# Altium PCB PCB_MATIASALFARO_PROYECTOFINAL.PcbDoc
Units mil, origin at the board's own origin, x right, y up, seen from the top; angles counter-clockwise.
Board outline 3543.31 x 2244.09 mil, 2 copper layers (Top Layer, Bottom Layer); 59 components, 43 nets, 235 pads, 66 vias.
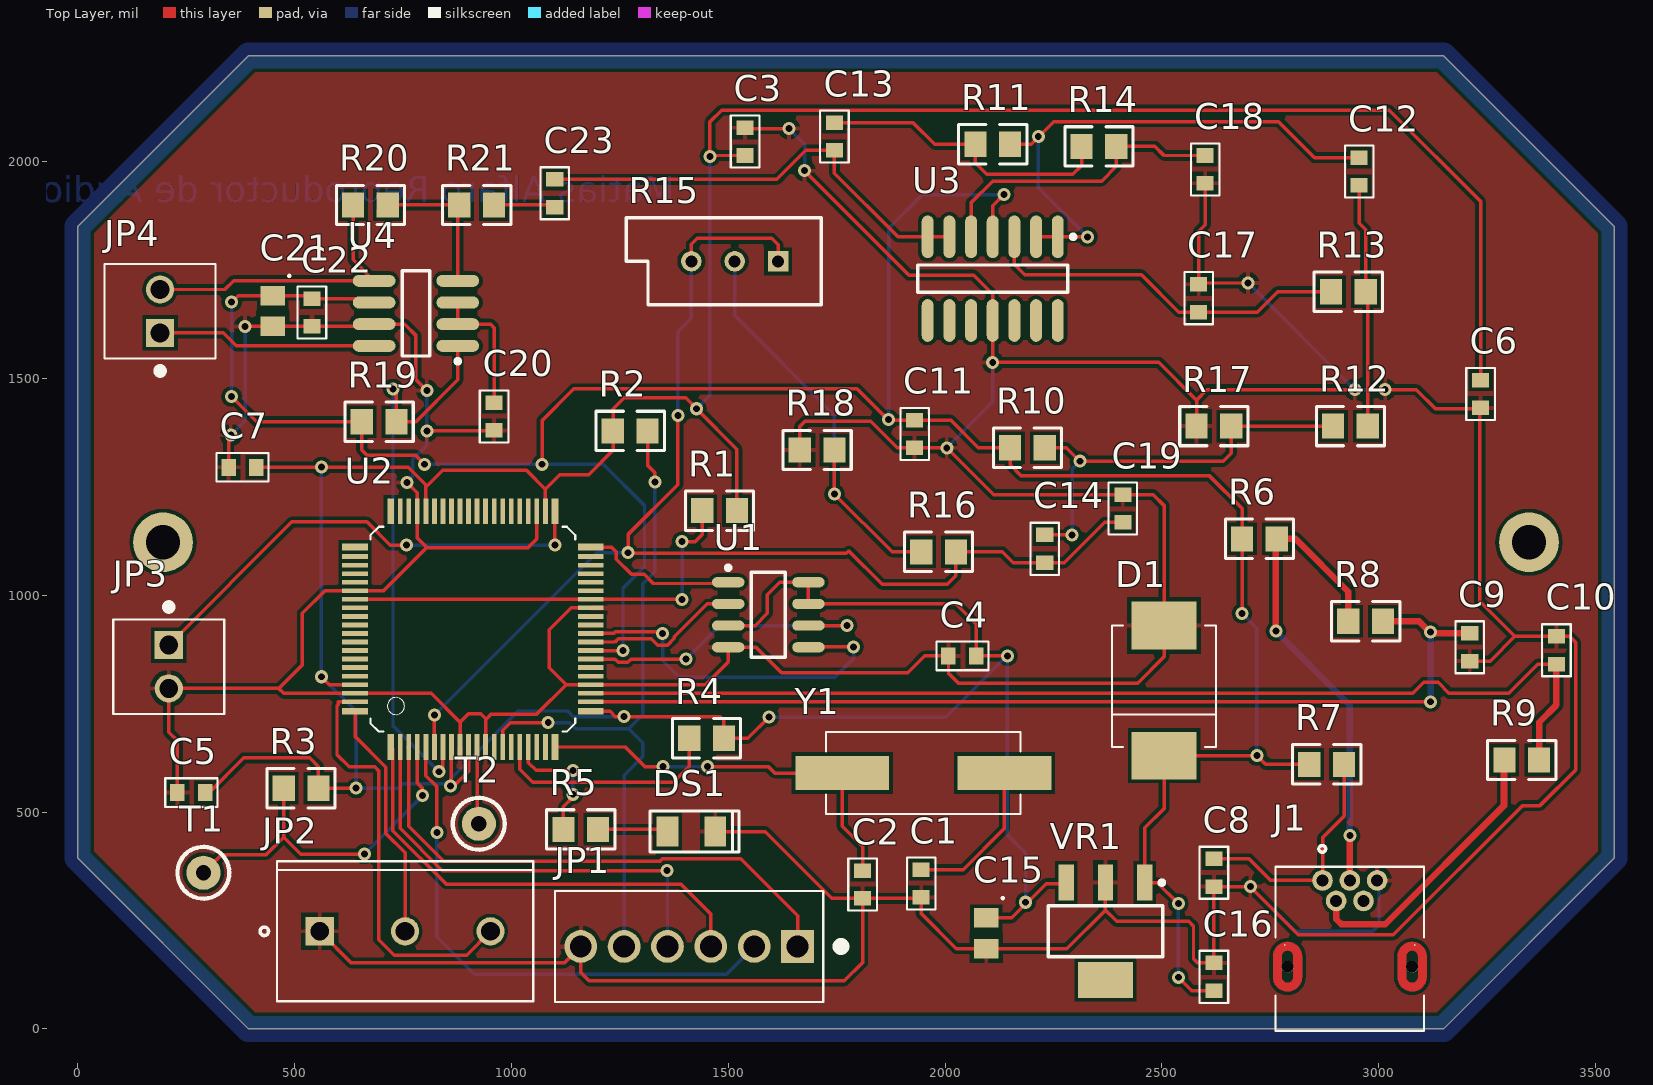
[diagram p0: Top Layer view]
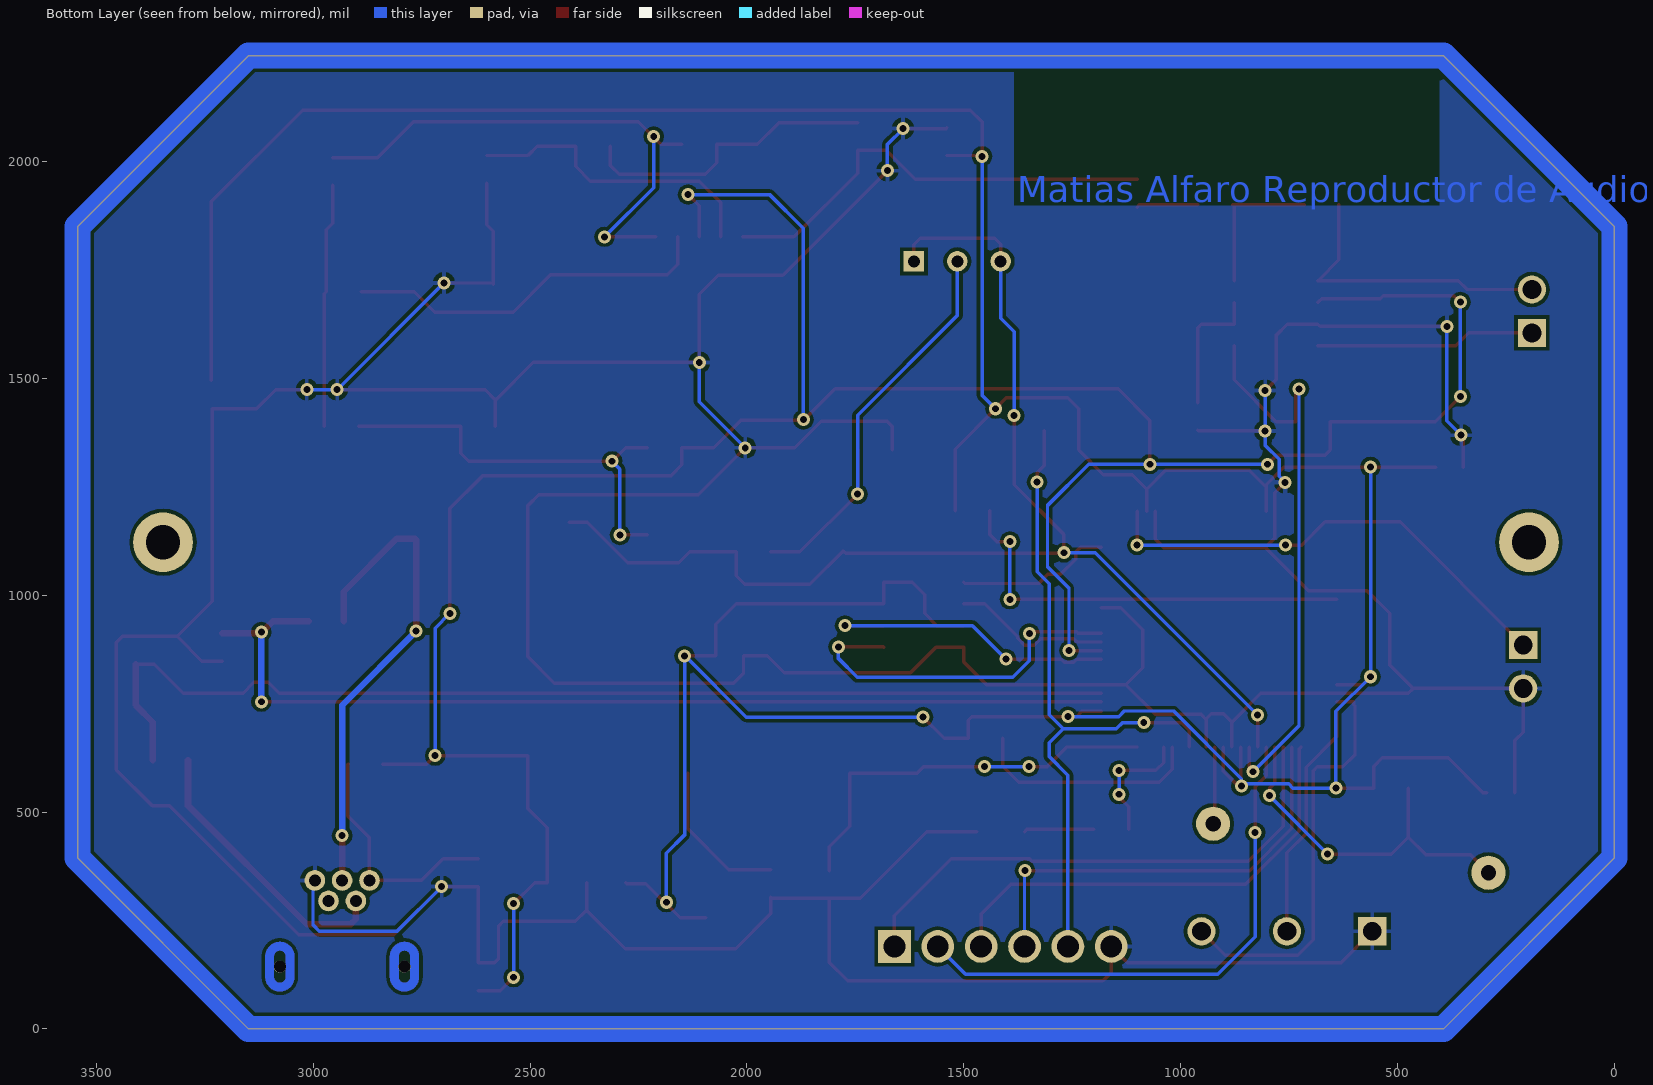
[diagram p1: Bottom Layer view, seen from below]
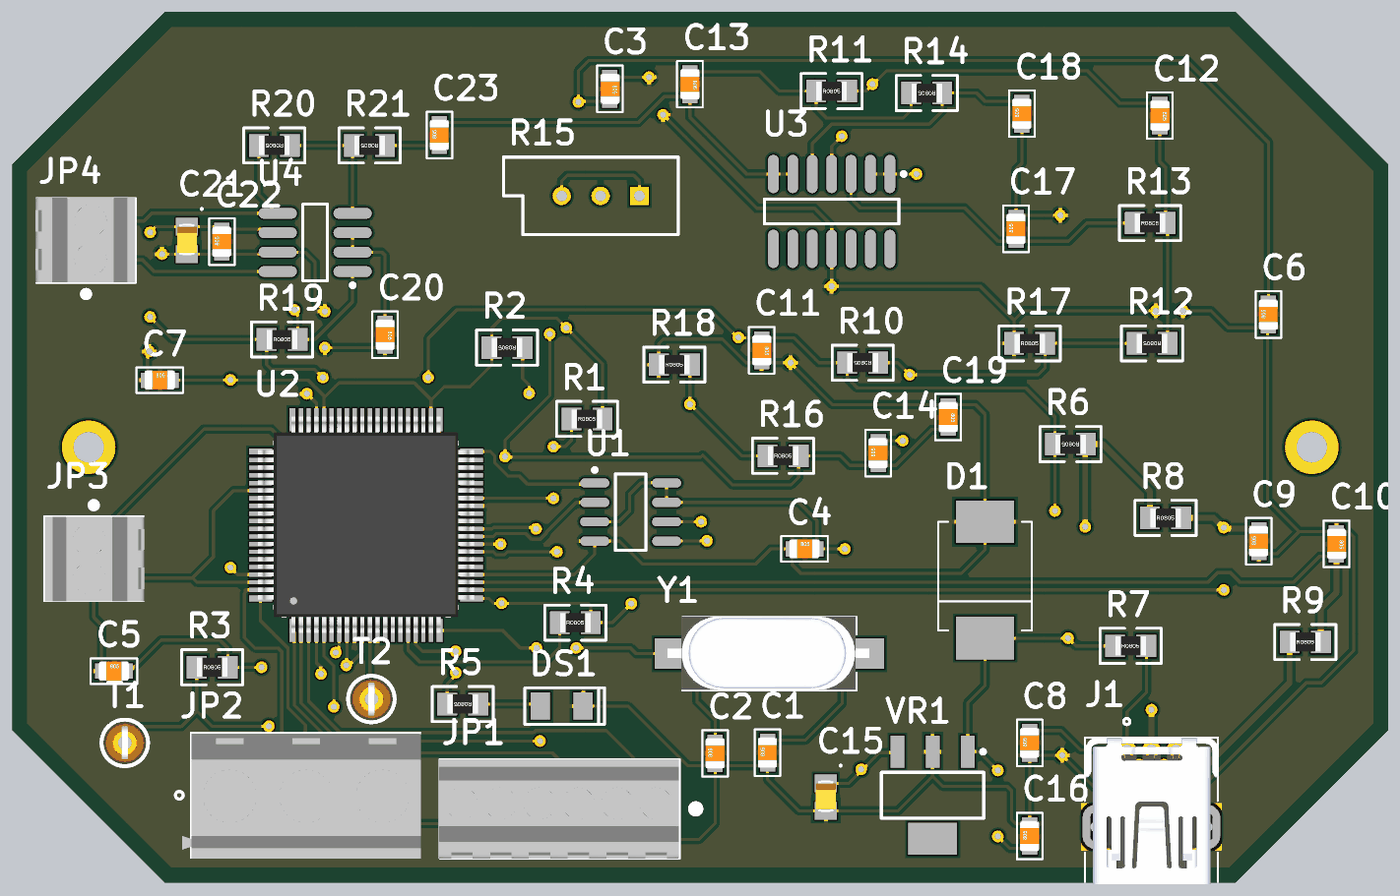
[diagram p2: 3D render of the assembled board from above, using the file's embedded part models]

## Layer stack, top to bottom
Top Solder: solder mask 0.4, Solder Resist, Dk 3.5
Top Layer: signal copper 1.4
Dielectric 1: dielectric 12.6, FR-4, Dk 4.8
Bottom Layer: signal copper 1.4
Bottom Solder: solder mask 0.4, Solder Resist, Dk 3.5

## Board outline
0,393.7 393.7,0 3149.61,0 3543.31,393.7 3543.31,1850.39 3149.61,2244.09 393.7,2244.09 0,1850.39

## Design rules (kind name [scope] priority, off if disabled: settings)
Clearance [All] p1: gap=8 ignorepadtopadclearanceinfootprint=FALSE
DiffPairsRouting [All] p1: maxlimit=10 minlimit=10 mostfreqgap=10 toplayer_minwidth=15 toplayer_maxwidth=15 toplayer_prefwidth=15 bottomlayer_minwidth=15 bottomlayer_maxwidth=15 bottomlayer_prefwidth=15 maxuncoupledlength=500
MinimumSolderMaskSliver [All] p1: minsoldermaskwidth=0
PolygonConnect [All] p1: connectstyle=Relief reliefconductorwidth=10 reliefentries=4 polygonreliefangle="90 Angle" airgapwidth=10
RoutingVias [All] p1: holewidth=16 width=30 viastyle="Through Hole" minholewidth=16 minwidth=30 maxholewidth=28 maxwidth=50
SilkToSilkClearance [All] p1: silktosilkclearance=0
SilkToSolderMaskClearance [IsPad] p1: minsilkscreentomaskgap=0 clearancetoexposedcopper=TRUE
SolderMaskExpansion [All] p1: expansion=4
Width [All] p1: maxlimit=100 minlimit=8 preferedwidth=8
26 further rules are at their usual default settings.

## Classes and differential pairs
differential pair USB_D: +USB_D_P -USB_D_N
differential pair Micro_USB_D: +Micro_USB_D_P -Micro_USB_D_N

## Components (designator, comment, footprint, x,y, rotation, side; value= is the part's Value field where it differs from the comment)
C1 "Cap 33pF" "C 0805" 1945,335 r90 top value=33pF
C2 "Cap 33pF" "C 0805" 1810,333 r90 top value=33pF
C3 "Cap 100nF" "C 0805" 1539,2046 r270 top value=100nF
C4 "Cap 100nF" "C 0805" 2040,860 r0 top value=100nF
C5 "Cap 100nF" "C 0805" 262,545 r0 top value=100nF
C6 "Cap 100nF" "C 0805" 3235,1464 r90 top value=100nF
C7 "Cap 100nF" "C 0805" 380,1295 r0 top value=100nF
C8 "Cap 100nF" "C 0805" 2620,360 r90 top value=100nF
C9 "Cap 18pF" "C 0805" 3210,880 r90 top value=18pF
C10 "Cap 18pF" "C 0805" 3410,873 r270 top value=18pF
C11 "Cap 100nF" "C 0805" 1930,1372 r270 top value=100nF
C12 "Cap 4.7nF" "C 0805" 2955,1977 r270 top value=4.7nF
C13 "Cap 68nF" "C 0805" 1745,2058 r270 top value=68nF
C14 "Cap 100nF" "C 0805" 2230,1107 r90 top value=100nF
C15 "Cap 10uF x 16V" "c 0805 Tantalio" 2095,220.43 r270 top value="10uF x 16V"
C16 "Cap 220nF" "C 0805" 2620,120 r90 top value=220nF
C17 "Cap 2.7nF" "C 0805" 2585,1685 r90 top value=2.7nF
C18 "Cap 2.7nF" "C 0805" 2600,1982 r90 top value=2.7nF
C19 "Cap 68nF" "C 0805" 2410,1200 r270 top value=68nF
C20 "Cap 1uF" "C 0805" 960,1412 r270 top value=1uF
C21 "Cap 100uF x 16v" "c 0805 Tantalio" 450,1655.43 r270 top value="100uF x 16v"
C22 "Cap 100nF" "C 0805" 540,1652 r90 top value=100nF
C23 "Cap 470nF" "C 0805" 1100,1927 r90 top value=470nF
D1 "5.1V" DIODE_SMC 2505,780 r90 top
DS1 "LED SMD" "LED 1206 RED" 1415,455 r0 top
J1 "Conector Mini  USB" "Mini USB Hembra 90º DIP" 2933.5,143.43 r270 top
JP1 "Conector 6 pines" "Bornera 6 (2.54mm)" 1410,190 r180 top
JP2 "PUERTO SERIAL" "Bornera 3 (5mm)" 755,225 r0 top
JP3 "Pines M. a 90º + Jumper" "Bornera 2 (2.54mm)" 210,835 r270 top
JP4 "Pines M. a 90º + Jumper" "Bornera 2 (2.54mm)" 190,1655 r90 top
R1 "Res 0" "R 0805" 1480,1195 r0 top value=0
R2 "Res 10K" "R 0805" 1274,1379 r180 top value=10K
R3 "Res 10K" "R 0805" 515,555 r0 top value=10K
R4 "Res 0" "R 0805" 1450,670 r0 top value=0
R5 "Res 470" "R 0805" 1160,460 r180 top value=470
R6 "Res 1K5" "R 0805" 2725,1130 r180 top value=1K5
R7 "Res 100" "R 0805" 2880,610 r0 top value=100
R8 "Res 33" "R 0805" 2970,940 r0 top value=33
R9 "Res 33" "R 0805" 3330,620 r0 top value=33
R10 "Res 154K" "R 0805" 2190,1340 r180 top value=154K
R11 "Res 2K7" "R 0805" 2110,2040 r0 top value=2K7
R12 "Res 7K68" "R 0805" 2935,1390 r180 top value=7K68
R13 "Res 16K2" "R 0805" 2930,1700 r0 top value=16K2
R14 "Res 6K34" "R 0805" 2355,2035 r180 top value=6K34
R15 "RPot 500" VR5 1515,1770 r180 top value=500
R16 "Res 2K" "R 0805" 1985,1100 r0 top value=2K
R17 "Res 154K" "R 0805" 2620,1390 r0 top value=154K
R18 "Res 100" "R 0805" 1705,1335 r0 top value=100
R19 "Res 330K" "R 0805" 695,1400 r0 top value=330K
R20 "Res 22K" "R 0805" 675,1900 r180 top value=22K
R21 "Res 22K" "R 0805" 920,1900 r180 top value=22K
T1 "Test Point" "TestPoint Keystone 5000 Silver-Red" 290,360 r0 top
T2 "Test Point" "TestPoint Keystone 5000 Silver-Red" 925,473 r0 top
U1 "SST25VF032B" SO8_L 1592.52,955 r0 top
U2 "LPC1754" LQFP80 911.1,921.65 r0 top
U3 "MC33204" D014_M 2110,1730 r270 top
U4 "TS4871" SO8_M 780,1650 r180 top
VR1 "LM1117 3,3V" SOT223_L 2370,225 r270 top
Y1 "12 MHz" Cristal 1950,590 r0 top

## Footprints (in the part's own frame and the unit in brackets; to place one, negate y for a bottom-side part, rotate by r counter-clockwise, add the part's x,y. Pads: shape width x height; smd on the part's side, far side on the other; paste and mask are expansions set on the pad)
"Bornera 2 (2.54mm)" [mm] "CONN_282834-2"
  rect 1.65x1.65 hole 1.1: 1(-1.27,0)
  round 1.65 hole 1.1: 2(1.27,0)
  silkscreen extent -3.7,-3.25 2.77,3.25, body extent -2.74,-3.2 2.8,3.3, height 10.05
"Bornera 3 (5mm)" [mm] "TE_282836-3"
  rect 1.65x1.65 hole 1.1: 1(-5,0)
  round 1.65 hole 1.1: 2(0,0) 3(5,0)
  silkscreen extent -8.5,-4.1 7.5,4.1, body extent -8.05,-4.16 7.55,4.04, height 10.08
"Bornera 6 (2.54mm)" [mm]
  rect 1.92x1.92 hole 1.28: 1(-6.35,0)
  round 1.92 hole 1.28: 2(-3.81,0) 3(-1.27,0) 4(1.27,0) 5(3.81,0) 6(6.35,0)
  silkscreen extent -9.14,-3.25 7.85,3.25, body extent -7.8,-3.25 7.9,3.25, height 10.05
"C 0805" [mm]
  rect 0.85x1 smd: 1(-0.813,0) 2(0.813,0)
  silkscreen extent -1.52,-0.84 1.52,0.84, body extent -1,-0.62 1,0.64, height 0.78
"c 0805 Tantalio" [mm] "CAPC2012X140N"
  rect 1.15x1.45 smd: 1(-0.9,0) 2(0.9,0)
  silkscreen extent -2.08,0.94 -2.03,0.99, body extent -1.08,-0.65 0.97,0.65, height 1.2
Cristal [mm] "XTAL_ECS-120-18-5PX-TR"
  rect 5.5x2 smd: 1(-4.75,0) 2(4.75,0)
  silkscreen extent -5.7,-2.4 5.7,2.4, body extent -6.68,-2.36 6.52,2.44, height 4.3
D014_M [mm] "SOIC, 14-Leads, Body 8.7x3.9mm, Pitch 1.27mm, IPC Low Density"
  oval 2.5x0.7 smd: 1(-2.45,3.81) 2(-2.45,2.54) 3(-2.45,1.27) 4(-2.45,0) 5(-2.45,-1.27) 6(-2.45,-2.54) 7(-2.45,-3.81) 8(2.45,-3.81) 9(2.45,-2.54) 10(2.45,-1.27) 11(2.45,0) 12(2.45,1.27) 13(2.45,2.54) 14(2.45,3.81)
  silkscreen extent -2.57,-4.4 0.8,4.84, body extent -2,-4.38 2,4.38, height 1.75
DIODE_SMC [mil] "Diode; 2 Leads"
  rect 110x150 smd: 1(-150,0) 2(150,0)
  silkscreen extent -130,-120 150,120
"LED 1206 RED" [mil]
  rect 50x70 smd: 1(-55.12,0) 2(55.12,0)
  silkscreen extent -95,-47 110,47, body extent -65,-31 69,32, height 20
LQFP80 [mm] "SOT315-1"
  rect 0.4x1.5 smd: 1(-4.81,-6.9) 20(4.81,-6.9) 41(4.81,6.9) 60(-4.81,6.9)
  rect 0.28x1.5 smd: 2(-4.25,-6.9) 3(-3.75,-6.9) 4(-3.25,-6.9) 5(-2.75,-6.9) 6(-2.25,-6.9) 7(-1.75,-6.9) 8(-1.25,-6.9) 9(-0.75,-6.9) 10(-0.25,-6.9) 11(0.25,-6.9) 12(0.75,-6.9) 13(1.25,-6.9) 14(1.75,-6.9) 15(2.25,-6.9) 16(2.75,-6.9) 17(3.25,-6.9) 18(3.75,-6.9) 19(4.25,-6.9) 42(4.25,6.9) 43(3.75,6.9) 44(3.25,6.9) 45(2.75,6.9) 46(2.25,6.9) 47(1.75,6.9) 48(1.25,6.9) 49(0.75,6.9) 50(0.25,6.9) 51(-0.25,6.9) 52(-0.75,6.9) 53(-1.25,6.9) 54(-1.75,6.9) 55(-2.25,6.9) 56(-2.75,6.9) 57(-3.25,6.9) 58(-3.75,6.9) 59(-4.25,6.9)
  rect 1.5x0.4 smd: 21(6.9,-4.81) 40(6.9,4.81) 61(-6.9,4.81) 80(-6.9,-4.81)
  rect 1.5x0.28 smd: 22(6.9,-4.25) 23(6.9,-3.75) 24(6.9,-3.25) 25(6.9,-2.75) 26(6.9,-2.25) 27(6.9,-1.75) 28(6.9,-1.25) 29(6.9,-0.75) 30(6.9,-0.25) 31(6.9,0.25) 32(6.9,0.75) 33(6.9,1.25) 34(6.9,1.75) 35(6.9,2.25) 36(6.9,2.75) 37(6.9,3.25) 38(6.9,3.75) 39(6.9,4.25) 62(-6.9,4.25) 63(-6.9,3.75) 64(-6.9,3.25) 65(-6.9,2.75) 66(-6.9,2.25) 67(-6.9,1.75) 68(-6.9,1.25) 69(-6.9,0.75) 70(-6.9,0.25) 71(-6.9,-0.25) 72(-6.9,-0.75) 73(-6.9,-1.25) 74(-6.9,-1.75) 75(-6.9,-2.25) 76(-6.9,-2.75) 77(-6.9,-3.25) 78(-6.9,-3.75) 79(-6.9,-4.25)
  silkscreen extent -6,-6 6,6, body extent -7.07,-7.06 7.07,7.09, height 1.6
"Mini USB Hembra 90º DIP" [mm] "TE_2172034-1"
  round 1.208 hole 0.7: 1(-5.05,-1.6) 2(-3.85,-0.8) 3(-5.05,0) 4(-3.85,0.8) 5(-5.05,1.6)
  rect 0.1x0.1 smd paste-1 mask+0: SH1(-1.27,3.81) SH2(-1.27,-3.81)
  round 0.7 hole 0.7 unplated: SH1(0,3.65) SH2(0,-3.65)
  Top Layer region: 0.644,-2.801 0.689,-2.805 0.733,-2.81 0.777,-2.819 0.82,-2.829 0.863,-2.842 0.905,-2.856 0.946,-2.873 0.986,-2.893 1.025,-2.914 1.063,-2.937 1.1,-2.962 1.135,-2.989 1.169,-3.018 1.201,-3.049 1.232,-3.081 1.261,-3.115 1.288,-3.15 1.313,-3.187 1.336,-3.225 1.357,-3.264 1.377,-3.304 1.394,-3.345 1.408,-3.387 1.421,-3.43 1.431,-3.473 1.44,-3.517 1.445,-3.561 1.449,-3.606 1.45,-3.65 0.95,-3.65 0.95,-3.632 0.948,-3.613 0.946,-3.595 0.942,-3.577 0.938,-3.559 0.933,-3.542 0.927,-3.525 0.92,-3.508 0.912,-3.491 0.903,-3.475 0.894,-3.459 0.883,-3.444 0.872,-3.43 0.86,-3.416 0.847,-3.403 0.834,-3.39 0.82,-3.378 0.806,-3.367 0.791,-3.356 0.775,-3.347 0.759,-3.338 0.742,-3.33 0.725,-3.323 0.708,-3.317 0.691,-3.312 0.673,-3.308 0.655,-3.304 0.637,-3.302 0.618,-3.3 0.6,-3.3 0,-3.3 0,-2.8 0.6,-2.8
  Top Layer region: 1.449,-3.694 1.445,-3.739 1.44,-3.783 1.431,-3.827 1.421,-3.87 1.408,-3.913 1.394,-3.955 1.377,-3.996 1.357,-4.036 1.336,-4.075 1.313,-4.113 1.288,-4.15 1.261,-4.185 1.232,-4.219 1.201,-4.251 1.169,-4.282 1.135,-4.311 1.1,-4.338 1.063,-4.363 1.025,-4.386 0.986,-4.407 0.946,-4.427 0.905,-4.444 0.863,-4.458 0.82,-4.471 0.777,-4.481 0.733,-4.49 0.689,-4.495 0.644,-4.499 0.6,-4.5 0,-4.5 0,-4 0.6,-4 0.618,-4 0.637,-3.998 0.655,-3.996 0.673,-3.992 0.691,-3.988 0.708,-3.983 0.725,-3.977 0.742,-3.97 0.759,-3.962 0.775,-3.953 0.791,-3.944 0.806,-3.933 0.82,-3.922 0.834,-3.91 0.847,-3.897 0.86,-3.884 0.872,-3.87 0.883,-3.856 0.894,-3.841 0.903,-3.825 0.912,-3.809 0.92,-3.792 0.927,-3.775 0.933,-3.758 0.938,-3.741 0.942,-3.723 0.946,-3.705 0.948,-3.687 0.95,-3.668 0.95,-3.65 1.45,-3.65
  Top Layer region: -0.95,-3.668 -0.948,-3.687 -0.946,-3.705 -0.942,-3.723 -0.938,-3.741 -0.933,-3.758 -0.927,-3.775 -0.92,-3.792 -0.912,-3.809 -0.903,-3.825 -0.894,-3.841 -0.883,-3.856 -0.872,-3.87 -0.86,-3.884 -0.847,-3.897 -0.834,-3.91 -0.82,-3.922 -0.806,-3.933 -0.791,-3.944 -0.775,-3.953 -0.759,-3.962 -0.742,-3.97 -0.725,-3.977 -0.708,-3.983 -0.691,-3.988 -0.673,-3.992 -0.655,-3.996 -0.637,-3.998 -0.618,-4 -0.6,-4 0,-4 0,-4.5 -0.6,-4.5 -0.644,-4.499 -0.689,-4.495 -0.733,-4.49 -0.777,-4.481 -0.82,-4.471 -0.863,-4.458 -0.905,-4.444 -0.946,-4.427 -0.986,-4.407 -1.025,-4.386 -1.063,-4.363 -1.1,-4.338 -1.135,-4.311 -1.169,-4.282 -1.201,-4.251 -1.232,-4.219 -1.261,-4.185 -1.288,-4.15 -1.313,-4.113 -1.336,-4.075 -1.357,-4.036 -1.377,-3.996 -1.394,-3.955 -1.408,-3.913 -1.421,-3.87 -1.431,-3.827 -1.44,-3.783 -1.445,-3.739 -1.449,-3.694 -1.45,-3.65 -0.95,-3.65
  Top Layer region: 0,-3.3 -0.6,-3.3 -0.618,-3.3 -0.637,-3.302 -0.655,-3.304 -0.673,-3.308 -0.691,-3.312 -0.708,-3.317 -0.725,-3.323 -0.742,-3.33 -0.759,-3.338 -0.775,-3.347 -0.791,-3.356 -0.806,-3.367 -0.82,-3.378 -0.834,-3.39 -0.847,-3.403 -0.86,-3.416 -0.872,-3.43 -0.883,-3.444 -0.894,-3.459 -0.903,-3.475 -0.912,-3.491 -0.92,-3.508 -0.927,-3.525 -0.933,-3.542 -0.938,-3.559 -0.942,-3.577 -0.946,-3.595 -0.948,-3.613 -0.95,-3.632 -0.95,-3.65 -1.45,-3.65 -1.449,-3.606 -1.445,-3.561 -1.44,-3.517 -1.431,-3.473 -1.421,-3.43 -1.408,-3.387 -1.394,-3.345 -1.377,-3.304 -1.357,-3.264 -1.336,-3.225 -1.313,-3.187 -1.288,-3.15 -1.261,-3.115 -1.232,-3.081 -1.201,-3.049 -1.169,-3.018 -1.135,-2.989 -1.1,-2.962 -1.063,-2.937 -1.025,-2.914 -0.986,-2.893 -0.946,-2.873 -0.905,-2.856 -0.863,-2.842 -0.82,-2.829 -0.777,-2.819 -0.733,-2.81 -0.689,-2.805 -0.644,-2.801 -0.6,-2.8 0,-2.8
  Top Layer region: 0.644,4.499 0.689,4.495 0.733,4.49 0.777,4.481 0.82,4.471 0.863,4.458 0.905,4.444 0.946,4.427 0.986,4.407 1.025,4.386 1.063,4.363 1.1,4.338 1.135,4.311 1.169,4.282 1.201,4.251 1.232,4.219 1.261,4.185 1.288,4.15 1.313,4.113 1.336,4.075 1.357,4.036 1.377,3.996 1.394,3.955 1.408,3.913 1.421,3.87 1.431,3.827 1.44,3.783 1.445,3.739 1.449,3.694 1.45,3.65 0.95,3.65 0.95,3.668 0.948,3.687 0.946,3.705 0.942,3.723 0.938,3.741 0.933,3.758 0.927,3.775 0.92,3.792 0.912,3.809 0.903,3.825 0.894,3.841 0.883,3.856 0.872,3.87 0.86,3.884 0.847,3.897 0.834,3.91 0.82,3.922 0.806,3.933 0.791,3.944 0.775,3.953 0.759,3.962 0.742,3.97 0.725,3.977 0.708,3.983 0.691,3.988 0.673,3.992 0.655,3.996 0.637,3.998 0.618,4 0.6,4 0,4 0,4.5 0.6,4.5
  Top Layer region: 1.449,3.606 1.445,3.561 1.44,3.517 1.431,3.473 1.421,3.43 1.408,3.387 1.394,3.345 1.377,3.304 1.357,3.264 1.336,3.225 1.313,3.187 1.288,3.15 1.261,3.115 1.232,3.081 1.201,3.049 1.169,3.018 1.135,2.989 1.1,2.962 1.063,2.937 1.025,2.914 0.986,2.893 0.946,2.873 0.905,2.856 0.863,2.842 0.82,2.829 0.777,2.819 0.733,2.81 0.689,2.805 0.644,2.801 0.6,2.8 0,2.8 0,3.3 0.6,3.3 0.618,3.3 0.637,3.302 0.655,3.304 0.673,3.308 0.691,3.312 0.708,3.317 0.725,3.323 0.742,3.33 0.759,3.338 0.775,3.347 0.791,3.356 0.806,3.367 0.82,3.378 0.834,3.39 0.847,3.403 0.86,3.416 0.872,3.43 0.883,3.444 0.894,3.459 0.903,3.475 0.912,3.491 0.92,3.508 0.927,3.525 0.933,3.542 0.938,3.559 0.942,3.577 0.946,3.595 0.948,3.613 0.95,3.632 0.95,3.65 1.45,3.65
  Top Layer region: -0.95,3.632 -0.948,3.613 -0.946,3.595 -0.942,3.577 -0.938,3.559 -0.933,3.542 -0.927,3.525 -0.92,3.508 -0.912,3.491 -0.903,3.475 -0.894,3.459 -0.883,3.444 -0.872,3.43 -0.86,3.416 -0.847,3.403 -0.834,3.39 -0.82,3.378 -0.806,3.367 -0.791,3.356 -0.775,3.347 -0.759,3.338 -0.742,3.33 -0.725,3.323 -0.708,3.317 -0.691,3.312 -0.673,3.308 -0.655,3.304 -0.637,3.302 -0.618,3.3 -0.6,3.3 0,3.3 0,2.8 -0.6,2.8 -0.644,2.801 -0.689,2.805 -0.733,2.81 -0.777,2.819 -0.82,2.829 -0.863,2.842 -0.905,2.856 -0.946,2.873 -0.986,2.893 -1.025,2.914 -1.063,2.937 -1.1,2.962 -1.135,2.989 -1.169,3.018 -1.201,3.049 -1.232,3.081 -1.261,3.115 -1.288,3.15 -1.313,3.187 -1.336,3.225 -1.357,3.264 -1.377,3.304 -1.394,3.345 -1.408,3.387 -1.421,3.43 -1.431,3.473 -1.44,3.517 -1.445,3.561 -1.449,3.606 -1.45,3.65 -0.95,3.65
  Top Layer region: 0,4 -0.6,4 -0.618,4 -0.637,3.998 -0.655,3.996 -0.673,3.992 -0.691,3.988 -0.708,3.983 -0.725,3.977 -0.742,3.97 -0.759,3.962 -0.775,3.953 -0.791,3.944 -0.806,3.933 -0.82,3.922 -0.834,3.91 -0.847,3.897 -0.86,3.884 -0.872,3.87 -0.883,3.856 -0.894,3.841 -0.903,3.825 -0.912,3.809 -0.92,3.792 -0.927,3.775 -0.933,3.758 -0.938,3.741 -0.942,3.723 -0.946,3.705 -0.948,3.687 -0.95,3.668 -0.95,3.65 -1.45,3.65 -1.449,3.694 -1.445,3.739 -1.44,3.783 -1.431,3.827 -1.421,3.87 -1.408,3.913 -1.394,3.955 -1.377,3.996 -1.357,4.036 -1.336,4.075 -1.313,4.113 -1.288,4.15 -1.261,4.185 -1.232,4.219 -1.201,4.251 -1.169,4.282 -1.135,4.311 -1.1,4.338 -1.063,4.363 -1.025,4.386 -0.986,4.407 -0.946,4.427 -0.905,4.444 -0.863,4.458 -0.82,4.471 -0.777,4.481 -0.733,4.49 -0.689,4.495 -0.644,4.499 -0.6,4.5 0,4.5
  Bottom Layer region: 0,-3.3 -0.6,-3.3 -0.618,-3.3 -0.637,-3.302 -0.655,-3.304 -0.673,-3.308 -0.691,-3.312 -0.708,-3.317 -0.725,-3.323 -0.742,-3.33 -0.759,-3.338 -0.775,-3.347 -0.791,-3.356 -0.806,-3.367 -0.82,-3.378 -0.834,-3.39 -0.847,-3.403 -0.86,-3.416 -0.872,-3.43 -0.883,-3.444 -0.894,-3.459 -0.903,-3.475 -0.912,-3.491 -0.92,-3.508 -0.927,-3.525 -0.933,-3.542 -0.938,-3.559 -0.942,-3.577 -0.946,-3.595 -0.948,-3.613 -0.95,-3.632 -0.95,-3.65 -1.45,-3.65 -1.449,-3.606 -1.445,-3.561 -1.44,-3.517 -1.431,-3.473 -1.421,-3.43 -1.408,-3.387 -1.394,-3.345 -1.377,-3.304 -1.357,-3.264 -1.336,-3.225 -1.313,-3.187 -1.288,-3.15 -1.261,-3.115 -1.232,-3.081 -1.201,-3.049 -1.169,-3.018 -1.135,-2.989 -1.1,-2.962 -1.063,-2.937 -1.025,-2.914 -0.986,-2.893 -0.946,-2.873 -0.905,-2.856 -0.863,-2.842 -0.82,-2.829 -0.777,-2.819 -0.733,-2.81 -0.689,-2.805 -0.644,-2.801 -0.6,-2.8 0,-2.8
  Bottom Layer region: -0.95,-3.668 -0.948,-3.687 -0.946,-3.705 -0.942,-3.723 -0.938,-3.741 -0.933,-3.758 -0.927,-3.775 -0.92,-3.792 -0.912,-3.809 -0.903,-3.825 -0.894,-3.841 -0.883,-3.856 -0.872,-3.87 -0.86,-3.884 -0.847,-3.897 -0.834,-3.91 -0.82,-3.922 -0.806,-3.933 -0.791,-3.944 -0.775,-3.953 -0.759,-3.962 -0.742,-3.97 -0.725,-3.977 -0.708,-3.983 -0.691,-3.988 -0.673,-3.992 -0.655,-3.996 -0.637,-3.998 -0.618,-4 -0.6,-4 0,-4 0,-4.5 -0.6,-4.5 -0.644,-4.499 -0.689,-4.495 -0.733,-4.49 -0.777,-4.481 -0.82,-4.471 -0.863,-4.458 -0.905,-4.444 -0.946,-4.427 -0.986,-4.407 -1.025,-4.386 -1.063,-4.363 -1.1,-4.338 -1.135,-4.311 -1.169,-4.282 -1.201,-4.251 -1.232,-4.219 -1.261,-4.185 -1.288,-4.15 -1.313,-4.113 -1.336,-4.075 -1.357,-4.036 -1.377,-3.996 -1.394,-3.955 -1.408,-3.913 -1.421,-3.87 -1.431,-3.827 -1.44,-3.783 -1.445,-3.739 -1.449,-3.694 -1.45,-3.65 -0.95,-3.65
  Bottom Layer region: 1.449,-3.694 1.445,-3.739 1.44,-3.783 1.431,-3.827 1.421,-3.87 1.408,-3.913 1.394,-3.955 1.377,-3.996 1.357,-4.036 1.336,-4.075 1.313,-4.113 1.288,-4.15 1.261,-4.185 1.232,-4.219 1.201,-4.251 1.169,-4.282 1.135,-4.311 1.1,-4.338 1.063,-4.363 1.025,-4.386 0.986,-4.407 0.946,-4.427 0.905,-4.444 0.863,-4.458 0.82,-4.471 0.777,-4.481 0.733,-4.49 0.689,-4.495 0.644,-4.499 0.6,-4.5 0,-4.5 0,-4 0.6,-4 0.618,-4 0.637,-3.998 0.655,-3.996 0.673,-3.992 0.691,-3.988 0.708,-3.983 0.725,-3.977 0.742,-3.97 0.759,-3.962 0.775,-3.953 0.791,-3.944 0.806,-3.933 0.82,-3.922 0.834,-3.91 0.847,-3.897 0.86,-3.884 0.872,-3.87 0.883,-3.856 0.894,-3.841 0.903,-3.825 0.912,-3.809 0.92,-3.792 0.927,-3.775 0.933,-3.758 0.938,-3.741 0.942,-3.723 0.946,-3.705 0.948,-3.687 0.95,-3.668 0.95,-3.65 1.45,-3.65
  Bottom Layer region: 0.644,-2.801 0.689,-2.805 0.733,-2.81 0.777,-2.819 0.82,-2.829 0.863,-2.842 0.905,-2.856 0.946,-2.873 0.986,-2.893 1.025,-2.914 1.063,-2.937 1.1,-2.962 1.135,-2.989 1.169,-3.018 1.201,-3.049 1.232,-3.081 1.261,-3.115 1.288,-3.15 1.313,-3.187 1.336,-3.225 1.357,-3.264 1.377,-3.304 1.394,-3.345 1.408,-3.387 1.421,-3.43 1.431,-3.473 1.44,-3.517 1.445,-3.561 1.449,-3.606 1.45,-3.65 0.95,-3.65 0.95,-3.632 0.948,-3.613 0.946,-3.595 0.942,-3.577 0.938,-3.559 0.933,-3.542 0.927,-3.525 0.92,-3.508 0.912,-3.491 0.903,-3.475 0.894,-3.459 0.883,-3.444 0.872,-3.43 0.86,-3.416 0.847,-3.403 0.834,-3.39 0.82,-3.378 0.806,-3.367 0.791,-3.356 0.775,-3.347 0.759,-3.338 0.742,-3.33 0.725,-3.323 0.708,-3.317 0.691,-3.312 0.673,-3.308 0.655,-3.304 0.637,-3.302 0.618,-3.3 0.6,-3.3 0,-3.3 0,-2.8 0.6,-2.8
  Bottom Layer region: 0,4 -0.6,4 -0.618,4 -0.637,3.998 -0.655,3.996 -0.673,3.992 -0.691,3.988 -0.708,3.983 -0.725,3.977 -0.742,3.97 -0.759,3.962 -0.775,3.953 -0.791,3.944 -0.806,3.933 -0.82,3.922 -0.834,3.91 -0.847,3.897 -0.86,3.884 -0.872,3.87 -0.883,3.856 -0.894,3.841 -0.903,3.825 -0.912,3.809 -0.92,3.792 -0.927,3.775 -0.933,3.758 -0.938,3.741 -0.942,3.723 -0.946,3.705 -0.948,3.687 -0.95,3.668 -0.95,3.65 -1.45,3.65 -1.449,3.694 -1.445,3.739 -1.44,3.783 -1.431,3.827 -1.421,3.87 -1.408,3.913 -1.394,3.955 -1.377,3.996 -1.357,4.036 -1.336,4.075 -1.313,4.113 -1.288,4.15 -1.261,4.185 -1.232,4.219 -1.201,4.251 -1.169,4.282 -1.135,4.311 -1.1,4.338 -1.063,4.363 -1.025,4.386 -0.986,4.407 -0.946,4.427 -0.905,4.444 -0.863,4.458 -0.82,4.471 -0.777,4.481 -0.733,4.49 -0.689,4.495 -0.644,4.499 -0.6,4.5 0,4.5
  Bottom Layer region: -0.95,3.632 -0.948,3.613 -0.946,3.595 -0.942,3.577 -0.938,3.559 -0.933,3.542 -0.927,3.525 -0.92,3.508 -0.912,3.491 -0.903,3.475 -0.894,3.459 -0.883,3.444 -0.872,3.43 -0.86,3.416 -0.847,3.403 -0.834,3.39 -0.82,3.378 -0.806,3.367 -0.791,3.356 -0.775,3.347 -0.759,3.338 -0.742,3.33 -0.725,3.323 -0.708,3.317 -0.691,3.312 -0.673,3.308 -0.655,3.304 -0.637,3.302 -0.618,3.3 -0.6,3.3 0,3.3 0,2.8 -0.6,2.8 -0.644,2.801 -0.689,2.805 -0.733,2.81 -0.777,2.819 -0.82,2.829 -0.863,2.842 -0.905,2.856 -0.946,2.873 -0.986,2.893 -1.025,2.914 -1.063,2.937 -1.1,2.962 -1.135,2.989 -1.169,3.018 -1.201,3.049 -1.232,3.081 -1.261,3.115 -1.288,3.15 -1.313,3.187 -1.336,3.225 -1.357,3.264 -1.377,3.304 -1.394,3.345 -1.408,3.387 -1.421,3.43 -1.431,3.473 -1.44,3.517 -1.445,3.561 -1.449,3.606 -1.45,3.65 -0.95,3.65
  Bottom Layer region: 1.449,3.606 1.445,3.561 1.44,3.517 1.431,3.473 1.421,3.43 1.408,3.387 1.394,3.345 1.377,3.304 1.357,3.264 1.336,3.225 1.313,3.187 1.288,3.15 1.261,3.115 1.232,3.081 1.201,3.049 1.169,3.018 1.135,2.989 1.1,2.962 1.063,2.937 1.025,2.914 0.986,2.893 0.946,2.873 0.905,2.856 0.863,2.842 0.82,2.829 0.777,2.819 0.733,2.81 0.689,2.805 0.644,2.801 0.6,2.8 0,2.8 0,3.3 0.6,3.3 0.618,3.3 0.637,3.302 0.655,3.304 0.673,3.308 0.691,3.312 0.708,3.317 0.725,3.323 0.742,3.33 0.759,3.338 0.775,3.347 0.791,3.356 0.806,3.367 0.82,3.378 0.834,3.39 0.847,3.403 0.86,3.416 0.872,3.43 0.883,3.444 0.894,3.459 0.903,3.475 0.912,3.491 0.92,3.508 0.927,3.525 0.933,3.542 0.938,3.559 0.942,3.577 0.946,3.595 0.948,3.613 0.95,3.632 0.95,3.65 1.45,3.65
  Bottom Layer region: 0.644,4.499 0.689,4.495 0.733,4.49 0.777,4.481 0.82,4.471 0.863,4.458 0.905,4.444 0.946,4.427 0.986,4.407 1.025,4.386 1.063,4.363 1.1,4.338 1.135,4.311 1.169,4.282 1.201,4.251 1.232,4.219 1.261,4.185 1.288,4.15 1.313,4.113 1.336,4.075 1.357,4.036 1.377,3.996 1.394,3.955 1.408,3.913 1.421,3.87 1.431,3.827 1.44,3.783 1.445,3.739 1.449,3.694 1.45,3.65 0.95,3.65 0.95,3.668 0.948,3.687 0.946,3.705 0.942,3.723 0.938,3.741 0.933,3.758 0.927,3.775 0.92,3.792 0.912,3.809 0.903,3.825 0.894,3.841 0.883,3.856 0.872,3.87 0.86,3.884 0.847,3.897 0.834,3.91 0.82,3.922 0.806,3.933 0.791,3.944 0.775,3.953 0.759,3.962 0.742,3.97 0.725,3.977 0.708,3.983 0.691,3.988 0.673,3.992 0.655,3.996 0.637,3.998 0.618,4 0.6,4 0,4 0,4.5 0.6,4.5
  silkscreen extent -7.1,-4.35 3.75,4.35, body extent -5.84,-4.33 3.76,4.37, height 4.17
"R 0805" [mil] "Dimensiones: 2mmx1.25mmx0.60mm"
  rect 51.18x58.05 smd: 1(-40,0) 2(40,0)
  silkscreen extent -79,-45 79,45, body extent -39,-25 39,25, height 24
SO8_L [mm] "SOIC, 8-Leads, Body 4.9x3.9mm, Pitch 1.27mm, IPC High Density"
  oval 1.9x0.6 smd: 1(-2.35,1.905) 2(-2.35,0.635) 3(-2.35,-0.635) 4(-2.35,-1.905) 5(2.35,-1.905) 6(2.35,-0.635) 7(2.35,0.635) 8(2.35,1.905)
  silkscreen extent -2.47,-2.5 1,2.88, body extent -2,-2.5 2,2.5, height 1.75
SO8_M [mm] "SOIC, 8-Leads, Body 4.9x3.9mm, Pitch 1.27mm, IPC Low Density"
  oval 2.5x0.7 smd: 1(-2.45,1.905) 2(-2.45,0.635) 3(-2.45,-0.635) 4(-2.45,-1.905) 5(2.45,-1.905) 6(2.45,-0.635) 7(2.45,0.635) 8(2.45,1.905)
  silkscreen extent -2.58,-2.5 0.8,2.93, body extent -2,-2.5 2,2.5, height 1.75
SOT223_L [mm] "SOT223, 4-Leads, Body 6.5x3.5mm, Pitch 2.3mm, Lead Span 7mm, IPC High Density"
  rect 2.1x0.9 smd: 1(-2.85,2.3) 2(-2.85,0) 3(-2.85,-2.3)
  rect 2.1x3.2 smd: 4(2.85,0)
  silkscreen extent -2.97,-3.35 1.5,3.43, body extent -1.85,-3.35 1.85,3.35, height 1.7
"TestPoint Keystone 5000 Silver-Red" [mm]
  round 2 hole 0.9: 1(0,0)
  silkscreen extent -1.52,-1.52 1.51,1.52, body extent -1.27,-1.27 1.27,1.27, height 4.89
VR5 [mm] "Thru-Hole; 3 Leads"
  rect 1.2x1.2 hole 0.7: 1(-2.54,0)
  round 1.2 hole 0.7: 2(0,0) 3(2.54,0)
  silkscreen extent -5.08,-2.54 6.35,2.54

## Part data
C1 C2 C3 C4 C5 C6 C7 C8 C9 C10 C11 C12 C13 C14 C16 C17 C18 C19 C20 C22 C23: library part Cap, "Capacitor", LatestRevisionDate=17-Jul-2002, LatestRevisionNote="Re-released for DXP Platform.", PackageDescription="Radial Cap, Thru-Hole; 2 Leads; 0.3 in Pin Spacing", PackageReference=RAD-0.3, Published=8-Jun-2000, Publisher="Altium Limited"
C15: library part "Cap Pol1", "Capacitor Electrolitico", Manufacturer="Generic Components", Class I=Passive, Class II=Capacitor, Published=8-Jun-2000, Publisher="Altium Limited", Revision="July-2002: Re-released for DXP Platform."
C21: library part "Cap Pol1", "Polarized Capacitor (Radial)", LatestRevisionDate=17-Jul-2002, LatestRevisionNote="Re-released for DXP Platform.", PackageDescription="Polarized Capacitor (Radial); 2 Leads", PackageReference=RB7.6-15, Published=8-Jun-2000, Publisher="Altium Limited"
D1: library part "DIODE ZENER1", "Diodo Zener", Text Field1=30, Text Field2=20
DS1: library part LED1, "Led Color Verde", Manufacturer="Generic Components", Class I=Optoelectronic, Class II=LED, Published=8-Jun-2000, Publisher="Altium Limited", Revision="July-2002: Re-released for DXP Platform."
J1: library part 651005136421, "WR-COM Mini USB 2.0 Type B Vertical 5 Contacts", ComponentLink1Description=Manufacturer, ComponentLink1URL=http://www.we-online.de, ComponentLink2Description=Datasheet, ComponentLink2URL=http://katalog.we-online.de/em/datasheet/651005136421.pdf, PartNumber=651005136421, Published="June 2016", Publisher="Wurth Elektronik"
JP1: library part "Header 6", "Conector Hembra 90º", Manufacturer="Generic Components", Class=Connector
JP2: library part "HEADER 3", "PINES", Text Field1=0,009
JP3 JP4: library part ConectorX2, "Pines Macho", Text Field1=20, Text Field2=40
R1 R2 R3 R4 R5 R6 R7 R8 R9: library part Res1, "Resistencia", Manufacturer="Generic Components", Class I=Passive, Class II=Resistor, Published=8-Jun-2000, Publisher="Altium Limited", Revision="July-2002: Re-released for DXP Platform."
R10 R11 R12 R13 R14 R16 R17 R18 R19 R20 R21: library part Res1, "Resistor", LatestRevisionDate=17-Jul-2002, LatestRevisionNote="Re-released for DXP Platform.", PackageDescription="Axial Device, Thru-Hole; 2 Leads; 0.3 in Pin Spacing", PackageReference=AXIAL-0.3, Published=8-Jun-2000, Publisher="Altium Limited"
R15: library part RPot, "Potentiometer", LatestRevisionDate=17-Jul-2002, LatestRevisionNote="Re-released for DXP Platform.", PackageDescription="Variable Resistor, Thru-Hole; 3 Leads", PackageReference=VR5, Published=8-Jun-2000, Publisher="Altium Limited", Set Position=0.5, Sim Note="Enter the Resistance value and the set point into parameter fields."
T1 T2: library part UNIPIN
U2: "Microcontrolador LPC1754"
U3: "4 x Amplificador Operacional"
VR1: library part "Volt Reg", "Voltage Regulator", LatestRevisionDate=29-May-2009, LatestRevisionNote="IPC-7351 Footprint Added.", PackageDescription="3-Pin Transistor Outline Package 2.54 mm Pitch, 15.1 mm Lead Span", PackageReference=D2PAK, Published=24-Mar-1999, Publisher="Altium Limited"
Y1: library part XTAL, "Cristal", Manufacturer="Generic Components", Class I=Oscillator, Class II="Crystal Oscillator", Published=8-Jun-2000, Publisher="Altium Limited", Revision="July-2002: Re-released for DXP Platform."

## Free pads (board coordinates)
  round 137.8 hole 78.74: 7(196.85,1122.05) 9(3346.46,1122.05)

## Via types
v1: diameter 30, hole 16, Top Layer to Bottom Layer, 66 vias

## Nets (pads, with @x,y where several pads share a name; then routed paths per layer and width w, separated by ;. In a path a pad name is that pad's centre, name@x,y a point inside that pad or via, vN(x,y) a via of type N, cw(c..) or ccw(c..) an arc to the next point about the centre after c; other vN are vias at no path point)
+3.3: C3.2 C4.2 C5.2 C6.2 C7.2 C15.1 R1.2 R2.2 R3.2 R4.2 U1.3 U1.7 U1.8 U2.8 U2.10 U2.21 U2.42 U2.56 U2.77 VR1.3 | length 9592.7
  Top Layer w8: C5.2 303,545 383,625 535,625 555,605 R3.2 v1(642,555) ; C7.2 v1@562,1295 ; v1(562,812) 580.3,793.7 U2.77 ; v1(562,1296) v1@563,1297 ; v1@563,1295 762.18,1295 802.83,1254.35 802.83,1249.17 ; U2.56 802.83,1249.17 ; v1(860,560) 860,575.11 ; 861.89,577 U2.8 ; v1@871.06,564.06 901.26,594.26 U2.10 ; U2.42 1078.43,1244.43 ; U2.21 1227.72,732.28 1240,720 v1(1260,720) 1482,720 1490,712 R4.2 1545,670 v1(1594,719) ; U1.3 1562,930 1590,958 1590,1001 1619,1030 U1.8 U1.7 2025,980 2072,933 C4.2 v1(2144,860) ; R1.2 1520,1337 v1(1427,1430) 1402,1455 1260,1455 1235,1430 1235,1335 1178,1278 1112,1278 1078.43,1244.43 ; C3.2 1460,2014 v1(1458,2012) 1458,2092 1484.73,2118.73 3024.27,2118.73 3235,1908 C6.2 ; C15.1 2153.87,255.87 2233,335 2277.24,335 VR1.3 ; 802.83,1249.17 841.67,1288 1034.85,1288 1078.43,1244.43
  Bottom Layer w8: v1(562,1296) v1(562,812) 642,732 v1(642,555) 741,555 751,565 855,565 v1(860,560) 860,577 1016,733 1129.74,733 1142.74,720 v1(1260,720) ; v1(1427,1430) 1458,1461 v1(1458,2012) ; v1(1594,719) 2002,719 2143,860 v1(2144,860) 2144,447 2186,405 v1(2186,292)
+5: C11.1 C16.1 C21.1 C22.2 D1.1 R6.2 R7.1 R10.2 R19.1 U2.28 U3.4 U4.6 VR1.1 | length 6415.4
  Top Layer w8: v1(355,1458) 413,1400 R19.1 655,1335 667,1323 779,1323 v1(800,1302) ; v1(355,1676) 369.87,1690.87 C21.1 533.13,1690.87 C22.2 674.54,1684 U4.6 ; v1(1071,1302) 1071,1403 1144,1476 1797,1476 v1@1869,1404 ; U2.28 v1(1257.44,872.44) ; v1(1870,1405) v1@1869,1404 ; U3.4 2110,1898 v1(2136,1924) ; v1(2538,119) 2569,88 C16.1 ; v1(2538,289) 2489.8,337.2 VR1.1 2460.55,463.55 2505,508 D1.1 v1(2719,630) 2739,610 R7.1 ; v1(2685,958) R6.2 2685,1200 2610,1275 2176,1275 2150,1301 R10.2 2077,1340 2013,1404 C11.1 v1@1869,1404
  Bottom Layer w8: v1(355,1458) v1(355,1676) ; v1(800,1302) v1(1071,1302) 1212,1302 1307,1207 1307,1066 1257.44,1016.44 v1(1257.44,872.44) ; v1(1870,1405) 1870,1846 1948,1924 v1(2136,1924) ; v1(2538,119) v1(2538,289) ; v1(2685,958) 2719,924 v1(2719,630)
GND: C1.1 C2.1 C3.1 C4.1 C5.1 C6.1 C7.1 C8.1 C9.1 C10.1 C11.2 C15.2 C16.2 C17.2 C18.1 C19.1 C20.2 C21.2 C22.1 D1.2 DS1.2 J1.5 JP1.6 JP2.1 JP3.2 R17.1 R18.1 U1.4 U2.9 U2.12 U2.24 U2.33 U2.43 U2.57 U2.66 U2.78 U3.11 U4.7 VR1.2 | length 15729.4
  Top Layer w8: C5.1 230,664 210,684 JP3.2 464,785 ; C7.1 348,1364 v1(353,1369) ; v1(386,1620) C21.2 C22.1 678.54,1620 U4.7 754,1625 780,1599 780,1497 v1(805,1472) ; JP2.1 631.15,152 1122,152 JP1.6 1160,130 1179,111 1768,111 1810,153 C2.1 ; v1(759,1260) 783.15,1235.85 U2.57 783.15,1131.85 805,1110 705.24,1010.24 U2.66 570.24,1010.24 518,958 518,839 464,785 ; v1(805,1379) 959,1379 C20.2 ; 806,1109 1038,1109 1058.74,1129.74 U2.43 ; U2.9 881.57,707.43 ; U2.12 940.63,715.37 ; U2.33 1137.87,970.87 1087.44,920.44 1087.44,832.56 1126.3,793.7 ; DS1.2 1585,455 1739,301 C2.1 ; C3.1 1541,2076 v1(1640,2076) ; R18.1 1665,1389 1677,1401 1829,1401 1890,1340 C11.2 v1(2004,1340) 2112,1232 C19.1 2480,1232 2505,1207 D1.2 2505,858 2444,797 2031,797 2008,820 C4.1 1953,860 1914,821 1623,821 1564,880 U1.4 1500,846 1447.7,793.7 U2.24 1126.3,793.7 ; v1(1676,1979) 1917,1738 2066,1738 2110,1694 U3.11 v1(2110,1537) 2493,1537 2580,1450 ; VR1.2 2370,274 ; R17.1 2580,1450 ; C18.1 2600,1854 2585,1839 C17.2 2588,1720 v1(2699,1720) ; v1(2945,1474) 2604,1474 2580,1450 ; v1(3015,1474) 3087,1474 3131,1430 3233,1430 3233,986 3314,905 ; C9.1 3257,848 3314,905 ; 464,785 474.98,774.02 U2.78 814.98,774.02 881.57,707.43 ; 881.57,707.43 901.15,727 929,727 940.63,715.37 ; 940.63,715.37 942,714 954,726 1058.6,726 1126.3,793.7 ; C2.1 1943,301 C1.1 1945,266 2026,185 C15.2 2281,185 2370,274 ; 2370,274 2396,248 2562,248 2573,237 2573,162 2583,152 C16.2 C8.1 v1(2704,328) 2815,217 3034,217 3332,515 3372,515 3454,597 3454,891 3440,905 C10.1 3314,905
  Bottom Layer w8: v1(353,1369) 386,1402 v1(386,1620) ; v1(759,1260) 773,1274 773,1313.18 805,1345.18 v1(805,1379) v1(805,1472) ; v1(1640,2076) 1676,2040 v1(1676,1979) ; v1(2004,1340) 2110,1446 v1(2110,1537) ; v1(2699,1720) v1(2945,1474) v1(3015,1474) ; v1(2704,328) 2807,225 2986,225 3000.78,239.78 3000.78,342.24 J1.5
MEMSEL: U1.1 U2.40 | length 363.2
  Top Layer w8: U2.40 1230.98,1111.02 1242,1100 1242,1083 1276.99,1048.01 1305.99,1048.01 1327,1027 1497,1027 U1.1
Micro_USB_D_N: C10.2 R9.2 U2.23 | length 2513.3
  Top Layer w8: U2.23 3079.02,774.02 3104,799 3137,799 3161.98,774.02 3300.02,774.02 3367,841 C10.2
  Top Layer w15: R9.2 3370,707 3410,747 C10.2
Micro_USB_D_P: C9.2 R8.2 U2.22 | length 2306.7
  Top Layer w8: U2.22 v1(3120,754.33)
  Top Layer w15: R8.2 3093,940 v1@3119,914 ; v1@3121,912 C9.2
  Bottom Layer w15: v1(3120,754.33) v1(3120,915)
MISOx: U1.2 U2.29 | length 367.6
  Top Layer w8: U2.29 1238.94,892.13 1246.26,899.44 1323,899.44 1337.63,884.81 1359.99,884.81 1375.81,900.63 1375.81,903.81 1452,980 U1.2
MOSIx: U1.5 U2.30 | length 836.9
  Top Layer w8: U2.30 1236,911.81 1239.63,915.44 1345.18,915.44 v1(1348.81,911.81) ; U1.5 1686.04,881 v1(1789,881)
  Bottom Layer w8: v1(1348.81,911.81) 1348.81,849.19 1387,811 1746,811 1789,854 v1(1789,881)
NetC1_2: C1.2 Y1.2 | length 359.4
  Top Layer w8: C1.2 2042,367 2137.01,462.01 Y1.2
NetC2_2: C2.2 U2.20 Y1.1 | length 931.8
  Top Layer w8: U2.20 1263,650 1308,605 v1(1350,605) ; v1(1452,605) 1592,605 1607,590 Y1.1 1762.99,467.01 1810,420 C2.2
  Bottom Layer w8: v1(1350,605) v1(1452,605)
NetC8_2: C8.2 J1.1 R7.2 | length 560.2
  Top Layer w8: C8.2 2701,392 2750.76,342.24 J1.1 2870.51,440.51 2921,491 2921,609 R7.2
NetC12_1: C12.1 R11.2 U3.1 U3.2 | length 1257.9
  Top Layer w8: R11.2 2199,2040 v1@2216,2057 ; U3.2 U3.1 v1(2328.46,1826.46) ; v1(2215,2058) v1@2216,2059 ; v1@2217,2058 2251,2092 2769,2092 2852,2009 C12.1
  Bottom Layer w8: v1(2215,2058) 2215,1939.91 v1(2328.46,1826.46)
NetC12_2: C12.2 R12.1 R13.2 | length 563.3
  Top Layer w8: C12.2 2955,1858 2970,1843 R13.2 2975,1695 R12.1
NetC13_1: C13.1 R11.1 R14.2 | length 696.8
  Top Layer w8: C13.1 1926,2090 1976,2040 R11.1 2070,1997 2096,1971 2295,1971 2315,1991 R14.2
NetC14_1: C14.1 C19.2 R15.1 R15.3 R16.2 U2.6 | length 2999.5
  Top Layer w8: U2.6 v1(822.52,723.48) ; v1(1384,1414) 1384,1255 1269,1140 v1(1269,1098) 1270.45,1096.55 1772.55,1096.55 1778,1102 1855,1025 2005,1025 2025,1045 R16.2 2132,1100 2157,1075 C14.1 2275,1075 2368,1168 C19.2 ; R15.3 1415,1809 1429,1823 1600,1823 1615,1808 R15.1
  Bottom Layer w8: v1(822.52,723.48) 1197.04,1098 v1(1269,1098) ; v1(1384,1414) 1384,1608 1415,1639 R15.3 R15.3@1415,1785
NetC14_2: C14.2 R10.1 R12.2 R17.2 | length 988.8
  Top Layer w8: C14.2 v1(2293,1139) ; R10.1 2280,1340 v1(2311,1309) 2642,1309 2660,1327 R17.2 R12.2
  Bottom Layer w8: v1(2293,1139) 2293,1291 v1(2311,1309)
NetC17_1: C17.1 R13.1 U3.3 | length 858.5
  Top Layer w8: U3.3 2160,1763 2184,1739 2453,1739 2539,1653 C17.1 2720,1653 2767,1700 R13.1
NetC18_2: C18.2 R14.1 U3.5 | length 708
  Top Layer w8: U3.5 2060,1905 2110,1955 2361,1955 2395,1989 R14.1 2484,2035 2505,2014 C18.2
NetC20_1: C20.1 U4.2 U4.3 | length 309.9
  Top Layer w8: U4.3 U4.2 952,1625 960,1617 C20.1
NetC23_1: C23.1 R21.1 | length 142.1
  Top Layer w8: R21.1 1095,1900 C23.1
NetDS1_1: DS1.1 R5.1 | length 162
  Top Layer w8: R5.1 1354.88,460 DS1.1
NetJP3_1: JP3.1 U2.41 | length 1108
  Top Layer w8: JP3.1 494,1169 667,1169 720.47,1115.53 v1(758.47,1115.53) ; v1(1100.47,1115.53) U2.41
  Bottom Layer w8: v1(758.47,1115.53) v1(1100.47,1115.53)
NetJP4_1: JP4.1 U4.8 | length 506
  Top Layer w8: JP4.1 336,1605 366,1575 U4.8
NetJP4_2: JP4.2 R20.2 U4.5 | length 696.6
  Top Layer w8: JP4.2 339,1705 359.5,1725.5 U4.5@683.04,1725.5 ; R20.2 635,1773.54 U4.5@683.04,1725.5 ; U4.5 U4.5@683.04,1725.5
NetR1_1: R1.1 U2.34 U2.67 | length 995.4
  Top Layer w8: U2.67 U2.34 v1(1393.55,990.55) ; v1(1393.55,1123.55) 1423.55,1123.55 1440,1140 R1.1
  Bottom Layer w8: v1(1393.55,990.55) v1(1393.55,1123.55)
NetR4_1: R4.1 U2.16 | length 533.6
  Top Layer w8: U2.16 1019.37,598.63 1049,569 1373,569 1410,606 R4.1
NetR5_2: R5.2 U2.17 | length 291.5
  Top Layer w8: U2.17 1039.06,613.94 1057,596 v1(1142,596) ; R5.2 1120,512 1142,534 v1(1142,541)
  Bottom Layer w8: v1(1142,541) v1(1142,596)
NetR15_2: R15.2 R16.1 R18.2 | length 989.4
  Top Layer w8: R18.2 v1(1745,1233) 1878,1100 R16.1
  Bottom Layer w8: R15.2 1515,1645 1745,1415 v1(1745,1233)
NetR19_2: R19.2 U2.7 U4.1 | length 1327
  Top Layer w8: v1(727,1476) 735,1468 R19.2 780,1400 876.46,1496.46 U4.1 ; v1(833,593) 842.2,602.2 U2.7
  Bottom Layer w8: v1(727,1476) 727,699 v1(833,593)
NetR20_1: R20.1 R21.2 U4.4 | length 341.5
  Top Layer w8: R20.1 R21.2 876.46,1896.46 U4.4
RSTN: JP1.5 R2.1 U2.14 | length 1594.8
  Top Layer w8: U2.14 980,689 997,706 v1(1085,706) ; R2.1 1314,1300 1331,1283 v1(1331,1261)
  Bottom Layer w8: v1(1085,706) 1134.12,706 1148.12,692 1271,692 ; JP1.5 1260,585 1303,628 1303,660 1271,692 ; v1(1331,1261) 1331,1054 1303,1026 1303,724 1271,692
RSTOUT: T2.1 U2.11 | length 178.7
  Top Layer w8: U2.11 920.94,477.06 T2.1
"Rx Micro 0": JP2.2 U2.80 | length 555.1
  Top Layer w8: U2.80 639.45,674.55 710.27,603.73 710.27,450.48 755,405.75 JP2.2
S_Filtrada_DAC: C13.2 C23.2 U3.6 U3.7 | length 1051.5
  Top Layer w8: C23.2 1612,1959 1679,2026 C13.2 1745,1973 1891.54,1826.46 U3.7 U3.6
SCKx: U1.6 U2.27 | length 718.3
  Top Layer w8: U2.27 1238.94,852.76 1246.26,845.44 1268.62,845.44 1275.94,852.76 v1(1402.76,852.76) ; U1.6 v1(1774,930)
  Bottom Layer w8: v1(1402.76,852.76) 1480,930 v1(1774,930)
TCK: JP1.2 U2.5 | length 1242.6
  Top Layer w8: U2.5 802.83,584.17 828,559 v1(828,453)
  Bottom Layer w8: v1(828,453) 828,212 914,126 1496,126 JP1.2
TDI: JP1.4 U2.2 | length 1018.7
  Top Layer w8: U2.2 743.78,462.22 841,365 v1(1359,365)
  Bottom Layer w8: v1(1359,365) 1360,364 JP1.4
TDO: JP1.3 U2.1 | length 1083.1
  Top Layer w8: U2.1 726.27,645.46 726.27,457.1 849.37,334 1391,334 1460,265 JP1.3
TMS: JP1.1 U2.3 | length 1242.8
  Top Layer w8: U2.3@761.29,647.83 U2.3 763.46,467.54 844,387 1342.82,387 1347.82,392 1529,392 1660,261 JP1.1
TRST: R3.1 T1.1 U2.4 | length 841.4
  Top Layer w8: T1.1 332,402 435,402 475,442 ; R3.1 475,442 ; v1(660.82,403) 514,403 475,442 ; U2.4 783.15,567.03 795,555.18 v1(795,538)
  Bottom Layer w8: v1(660.82,403) 795,537.18 v1(795,538)
"Tx Micro 0": JP2.3 U2.79 | length 958.3
  Top Layer w8: U2.79 600.33,754.33 600.33,747.54 597.92,745.13 597.92,632.08 626,604 685,604 694.27,594.73 694.27,205.73 730,170 896.85,170 JP2.3
USB_D_N: J1.2 R9.1 | length 652.9
  Top Layer w15: J1.2 2902.01,252.99 2914,241 3015,241 3289,515 3289,619 R9.1
USB_D_P: J1.3 R6.1 R8.1 | length 1142.7
  Top Layer w15: v1(2763,917) 2763,1128 R6.1 2808,1130 2930,1008 R8.1 ; J1.3 v1(2933.5,445.5)
  Bottom Layer w15: v1(2763,917) 2933.5,746.5 v1(2933.5,445.5)
pads on no net: J1.4 J1.SH1 J1.SH2 U2.13 U2.15 U2.18 U2.19 U2.25 U2.26 U2.31 U2.32 U2.35 U2.36 U2.37 U2.38 U2.39 U2.44 U2.45 U2.46 U2.47 U2.48 U2.49 U2.50 U2.51 U2.52 U2.53 U2.54 U2.55 U2.58 U2.59 U2.60 U2.61 U2.62 U2.63 U2.64 U2.65 U2.68 U2.69 U2.70 U2.71 U2.72 U2.73 U2.74 U2.75 U2.76 U3.8 U3.9 U3.10 U3.12 U3.13 U3.14 VR1.4
copper on no net: | length 10652.3
  Bottom Layer w60: 0,393.7 393.7,0 3149.61,0 3543.31,393.7 3543.31,1850.39 3149.61,2244.09 393.7,2244.09 0,1850.39 0,393.7

## Polygon pours and split planes (outlines as drawn)
GND on Top Layer (solid, remove dead copper, pour order 0): -243,2342 -198,2387 3809,2387 3809,-295 3769,-255 -257,-255
GND on Bottom Layer (solid, remove dead copper, pour order 2): -226,2568 3987,2568 4096,2459 4096,-265 -142,-265 -239,-168

## Other copper
Bottom Layer:
  text "Matias Alfaro Reproductor de Audio 8 bits V1.0 Abril 2021" at 1377,1906 h60

## Text inside footprints (layer, text, board x,y; h text height)
J1: Mechanical 13 "PCB EDGE" at 2883.48,78.43 h19.7 r270